# EAGLE board v1 (EAGLE 7.3.0)
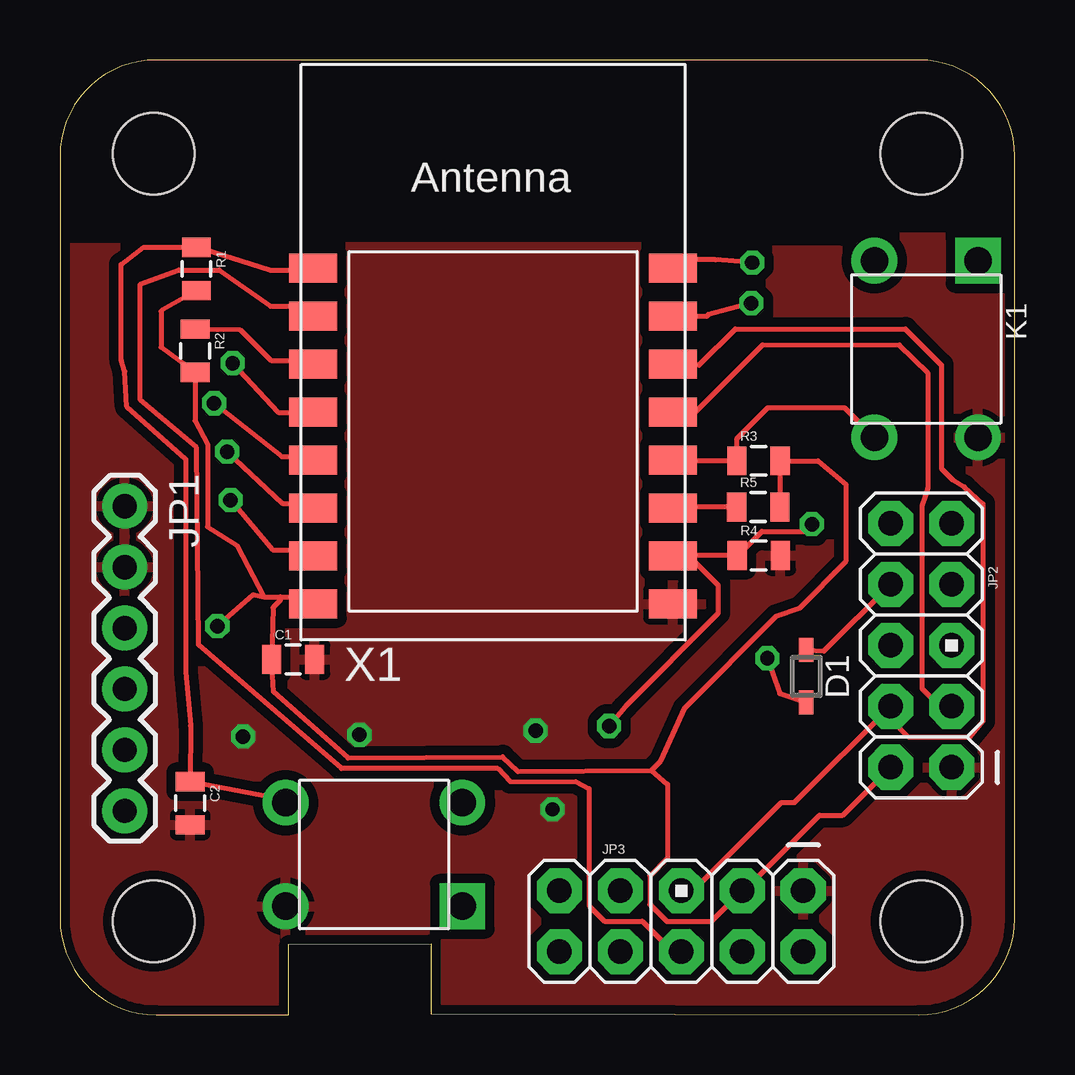
[diagram p0: board, top side]
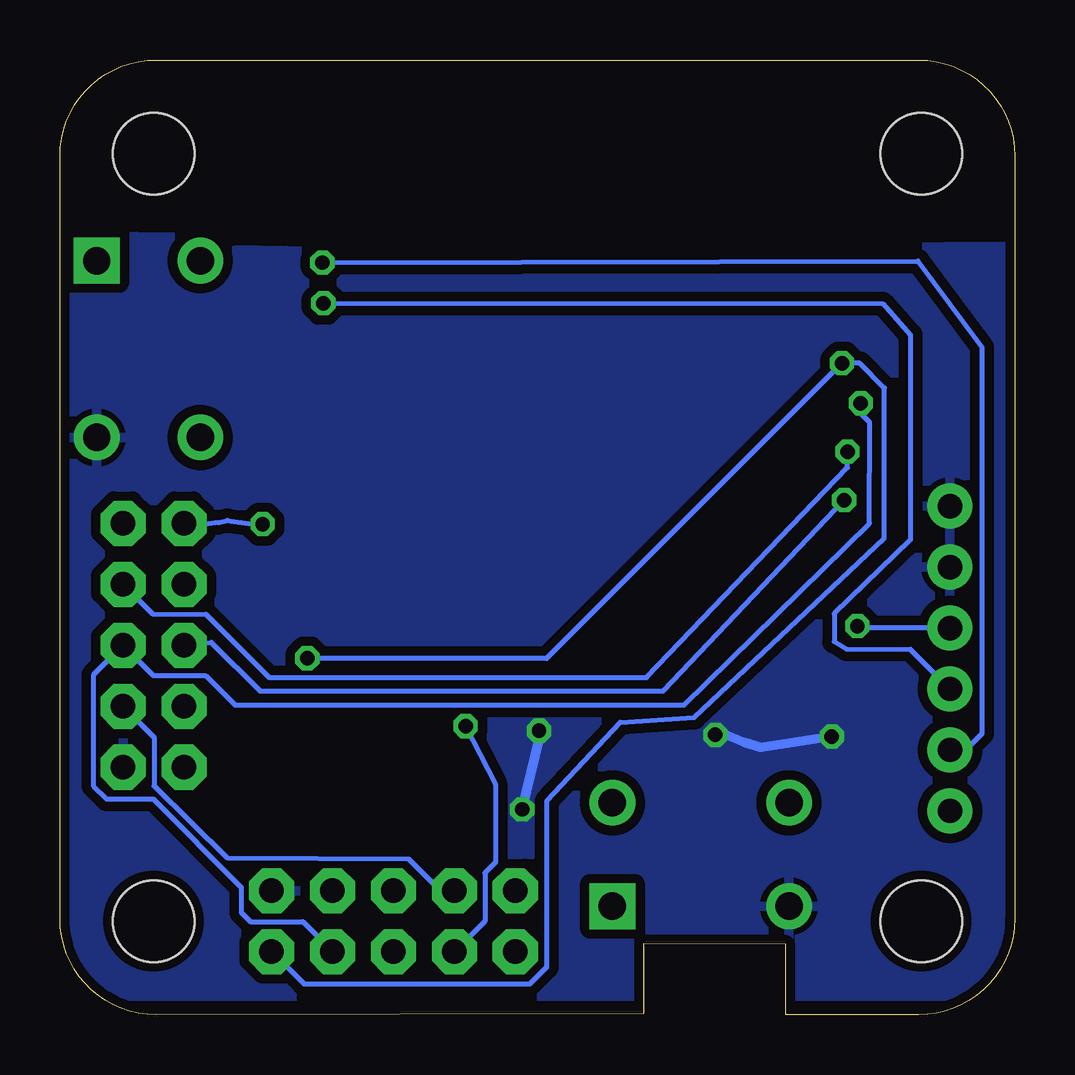
[diagram p1: board, bottom side, seen from below]

Size 39.8 x 39.8 mm. Coordinates in mm from the lower left corner, seen from the top.
Outline: 0,35.8 0,4 arc90 4,0 9.54,0 9.54,2.93 15.47,2.96 15.47,0.03 35.8,0 arc90 39.8,4 39.8,35.8 arc90 35.8,39.8 4,39.8 arc90 0,35.8
Copper layers (1*16): Top 0.035mm / dielectric 1.5mm / Bottom 0.035mm
Design rules "DFRobot_Eagle_Rule_v0.4": minimum track width 6mil, minimum drill 12mil, track to track 6mil, track to pad 6mil, pad to pad 6mil, via to via 6mil, smd to smd 0mil, copper to edge 10mil, drill to drill 10mil, minimum pad ring 12mil, minimum via ring 8mil, stop-mask expansion 2mil, vias tented up to drill 25mil, thermal gap 10mil
Holes 3.4 mm at 3.9,3.9 35.9,35.9 35.9,3.9 3.9,35.9
tRestrict: 16 lines
bRestrict: 16 lines

## Footprints (pad centres in the part's own frame; a part is rotated, then mirrored left to right if it is on the bottom)
0805 = smd 0.8 x 1.2: 1 -0.9,0; 2 0.9,0
SOD323 = smd 1 x 0.6: 1 -1.1,0; 2 1.1,0
1X06 = drill 1.016 pad 1.88: 1 0,0; 2 2.54,0; 3 5.08,0; 4 7.62,0; 5 10.16,0; 6 12.7,0
AVR_ICSP = drill 1.016 pad 1.88 octagon: 1 -1.27,5.08; 2 1.27,5.08; 3 -1.27,2.54; 4 1.27,2.54; 5 -1.27,0; 6 1.27,0; 7 -1.27,-2.54; 8 1.27,-2.54; 9 -1.27,-5.08; 10 1.27,-5.08
SW4-6.0X6.0X5.0MM = drill 1.143 pad 1.905 square: 1 -3.683,2.159 | drill 1.143 pad 1.905: 2 -3.683,-2.159; 3 3.683,-2.159; 4 3.683,2.159
ESP-12 = smd 2 x 1.2: 1 -7.5,4.5; 2 -7.5,2.5; 3 -7.5,0.5; 4 -7.5,-1.5; 5 -7.5,-3.5; 6 -7.5,-5.5; 7 -7.5,-7.5; 8 -7.5,-9.5; 9 7.5,-9.5; 10 7.5,-7.5; 11 7.5,-5.5; 12 7.5,-3.5; 13 7.5,-1.5; 14 7.5,0.5; 15 7.5,2.5; 16 7.5,4.5

## Placement (x,y rotation side)
C1  [0805]  9.72,14.81 0 top
C2  [0805]  5.43,8.82 270 top
D1  [SOD323]  31.11,14.11 270 top
JP1  [1X06]  2.7,21.2 270 top
JP2  [AVR_ICSP]  35.9,15.4 180 top
JP3  [AVR_ICSP]  25.9,3.9 270 top
K1  TS-1109  [SW4-6.0X6.0X5.0MM]  36.11,27.75 270 top
K2  TS-1109  [SW4-6.0X6.0X5.0MM]  13.09,6.68 180 top
R1  [0805]  5.69,31.09 270 top
R2  [0805]  5.63,27.68 270 top
R3  [0805]  29.12,23.09 0 top
R4  [0805]  29.13,19.15 0 top
R5  [0805]  29.11,21.16 0 top
X1  [ESP-12]  18.06,26.62 0 top

## Library data of the parts
C1 C2 = SparkFun-Capacitors
D1 = zetex; MPN: CDSOD323-T05C; OC_FARNELL: 1824860; OC_NEWARK: 79R6078
JP1 = SparkFun-Connectors; PROD_ID: CONN-08437
JP2 JP3 = SparkFun-Connectors
K1 K2 = Seeed-OPL-Button
R1-R5 = SparkFun-Passives
X1 = adafruit

## Nets
ADC: JP3.6 X1.2
GND: C1.2 C2.2 JP1.1 JP1.2 JP2.1 JP3.1 K1.4 K2.4 R4.2 X1.9
GPIO0: K1.3 R3.1 X1.12
GPIO2: R5.1 X1.11
GPIO4: JP2.3 JP3.7 X1.13
GPIO5: JP2.4 JP3.5 X1.14
GPIO12: JP3.9
GPIO13: JP3.10
GPIO14: JP2.5 JP3.4 X1.5
GPIO16: D1.2 JP3.2 X1.4
N$1: JP1.5 X1.16
N$2: JP1.4 X1.15
N$5: JP2.7 X1.6
N$6: JP2.6 X1.7
N$9: D1.1 JP2.8
N$10: C2.1 K2.3 R1.1 X1.1
N$11: R2.1 X1.3
SPI_CS: JP2.10 JP3.8 R4.1 X1.10
VCC: C1.1 JP1.3 JP2.2 JP3.3 R1.2 R2.2 R3.2 R5.2 X1.8

## Tracks (layer width: path | path; a pad name or v marks a point on that pad's centre or on a via)
ADC
  Top 0.2: X1.2 10.15,29.53 8.78,29.53 6.64,31.05 4.95,31.05 3.35,30.45 3.35,25.63 5.69,23.64 5.78,15.42 11.73,10.26 18.25,10.26 18.77,9.72 21.51,9.71 22.06,9.42 22.06,4.54 22.7,3.9 24.28,3.9 25.55,2.63 JP3.6
GND  (via drill 0.6)
  Bottom 0.4: v20.53,8.56 19.82,11.57 v19.83,11.84 | 12.02,11.66 11.27,11.35 10.58,11.15 v7.63,11.6
  other vias: 12.48,11.67
  pour Top (isolate 0.4): 0.3,39.42 39.38,39.42 39.38,0.3 0.43,0.3 0.43,20.09
  pour Bottom (isolate 0.4): 0.22,39.39 39.35,39.39 39.35,0.77 0.54,0.77 0.54,20.64
GPIO0
  Top 0.2: X1.12 25.59,23.09 R3.1 28.22,24.02 29.51,25.31 32.71,25.31 K1.3
GPIO2
  Top 0.2: R5.1 25.6,21.16 X1.11
GPIO4
  Top 0.2: JP2.3 36.5,13.02 35.93,13.6 35.93,21.21 36.07,21.62 36.17,21.95 36.17,26.76 34.99,27.92 29.3,27.93 26.49,25.12 X1.13
  Bottom 0.2: JP2.3 35.88,11.57 35.88,9.53 32.84,6.54 25.26,6.49 23.94,5.17 JP3.7
GPIO5
  Top 0.2: JP3.5 26.39,5.17 30.07,8.85 30.62,8.85 JP2.4 34.63,12.33 35.39,11.57 37.91,11.57 38.47,12.24 38.47,21.3 37.7,22 37.19,22.31 36.74,22.76 36.74,27.09 35.24,28.59 28.15,28.59 26.64,27.08 25.6,27.08 X1.14
GPIO14  (via drill 0.6)
  Top 0.2: v6.42,25.49 9.25,23.26 10.42,23.26 X1.5
  Bottom 0.2: v6.42,25.49 6.42,25.07 6.04,24.69 6.06,20.48 13.78,12.91 32.5,12.91 33.73,14.14 35.91,14.14 JP2.5 38.41,14.16 38.41,9.54 37.86,8.99 35.91,8.99 32.24,5.32 32.24,4.26 31.86,3.88 29.67,3.88 28.44,2.65 JP3.4
GPIO16  (via drill 0.6)
  Top 0.2: v7.2,27.16 9.11,25.11 X1.4 | v29.49,14.86 30.01,13.39 D1.2
  Bottom 0.2: v29.49,14.86 19.51,14.85 v7.2,27.16 6.46,27.16 5.43,26.13 5.44,19.87 13.37,12.39 16.44,12.19 19.5,8.91 19.5,1.99 20.21,1.28 29.63,1.28 JP3.2
N$1  (via drill 0.6)
  Top 0.2: v28.86,31.35 27.33,31.47 25.91,31.47 X1.16
  Bottom 0.2: v28.86,31.35 4.03,31.42 1.37,27.83 1.37,11.71 2.04,11.04 JP1.5
N$2  (via drill 0.6)
  Top 0.2: v28.82,29.66 27.03,29.19 26.96,29.12 X1.15
  Bottom 0.2: v28.82,29.66 5.5,29.64 4.35,28.34 4.35,19.8 7.52,16.72 7.52,15.56 7.01,15.24 4.35,15.23 JP1.4
N$5  (via drill 0.6)
  Top 0.2: v6.97,23.47 9.28,21.32 10.36,21.32 X1.6
  Bottom 0.2: JP2.7 35.94,16.71 33.71,16.69 31.08,14.06 15.35,14.06 6.97,22.81 v6.97,23.47
N$6  (via drill 0.6)
  Top 0.2: v7.11,21.45 8.87,19.38 10.3,19.38 X1.7
  Bottom 0.2: JP2.6 33.49,15.52 31.46,13.49 14.65,13.49 v7.11,21.45
N$9
  Top 0.2: D1.1 31.85,15.16 JP2.8
N$10
  Top 0.2: K2.3 9.7,8.92 C2.1 5.44,12.06 5.24,14.3 5.24,23.16 2.79,25.35 2.7,26.82 2.56,27.28 2.55,31.27 3.49,31.99 R1.1 8.73,31.05 10.49,31.05 X1.1
N$11
  Top 0.2: R2.1 7.51,28.56 8.81,27.27 10.41,27.27 X1.3
SPI_CS  (via drill 0.6)
  Top 0.2: v31.34,20.44 v31.35,20.45 31.05,20.15 29.25,20.15 28.25,19.15 R4.1 25.59,19.15 X1.10 26.22,19.12 27.43,17.91 27.43,16.73 23.58,12.85 v22.89,12.03
  Bottom 0.2: v31.35,20.45 31.78,20.45 32.83,20.61 33.19,20.51 33.77,20.44 JP2.10 | v22.89,12.03 21.65,9.62 21.65,6.35 22.09,5.91 22.09,3.9 JP3.8
VCC  (via drill 0.6)
  Top 0.2: R1.2 4.27,29.38 4.21,29.32 4.21,27.83 R2.2 5.63,24.76 6.15,23.79 6.15,20.34 7.38,19.56 8.51,17.42 | 8.51,17.42 9.18,17.42 | JP2.2 32.63,8.32 31.66,8.32 28.51,5.17 JP3.3 27.16,3.89 25.3,3.89 24.59,4.6 24.59,5.8 25.33,6.54 25.33,9.61 24.65,10.19 | 24.65,10.19 19.09,10.14 18.45,10.75 12,10.7 8.9,13.46 C1.1 8.88,16.97 9.18,17.27 9.18,17.42 | 24.65,10.19 25.05,10.59 26.05,12.78 29.86,16.62 30.85,16.96 32.78,18.92 32.78,22.1 31.61,23.09 R3.2 R5.2 | v6.56,16.2 8.06,17.51 8.51,17.42 | 9.18,17.42 10.26,17.42 X1.8
  Bottom 0.2: JP1.3 6.84,16.12 v6.56,16.2